# EAGLE board g47_ctl (EAGLE 4.16)
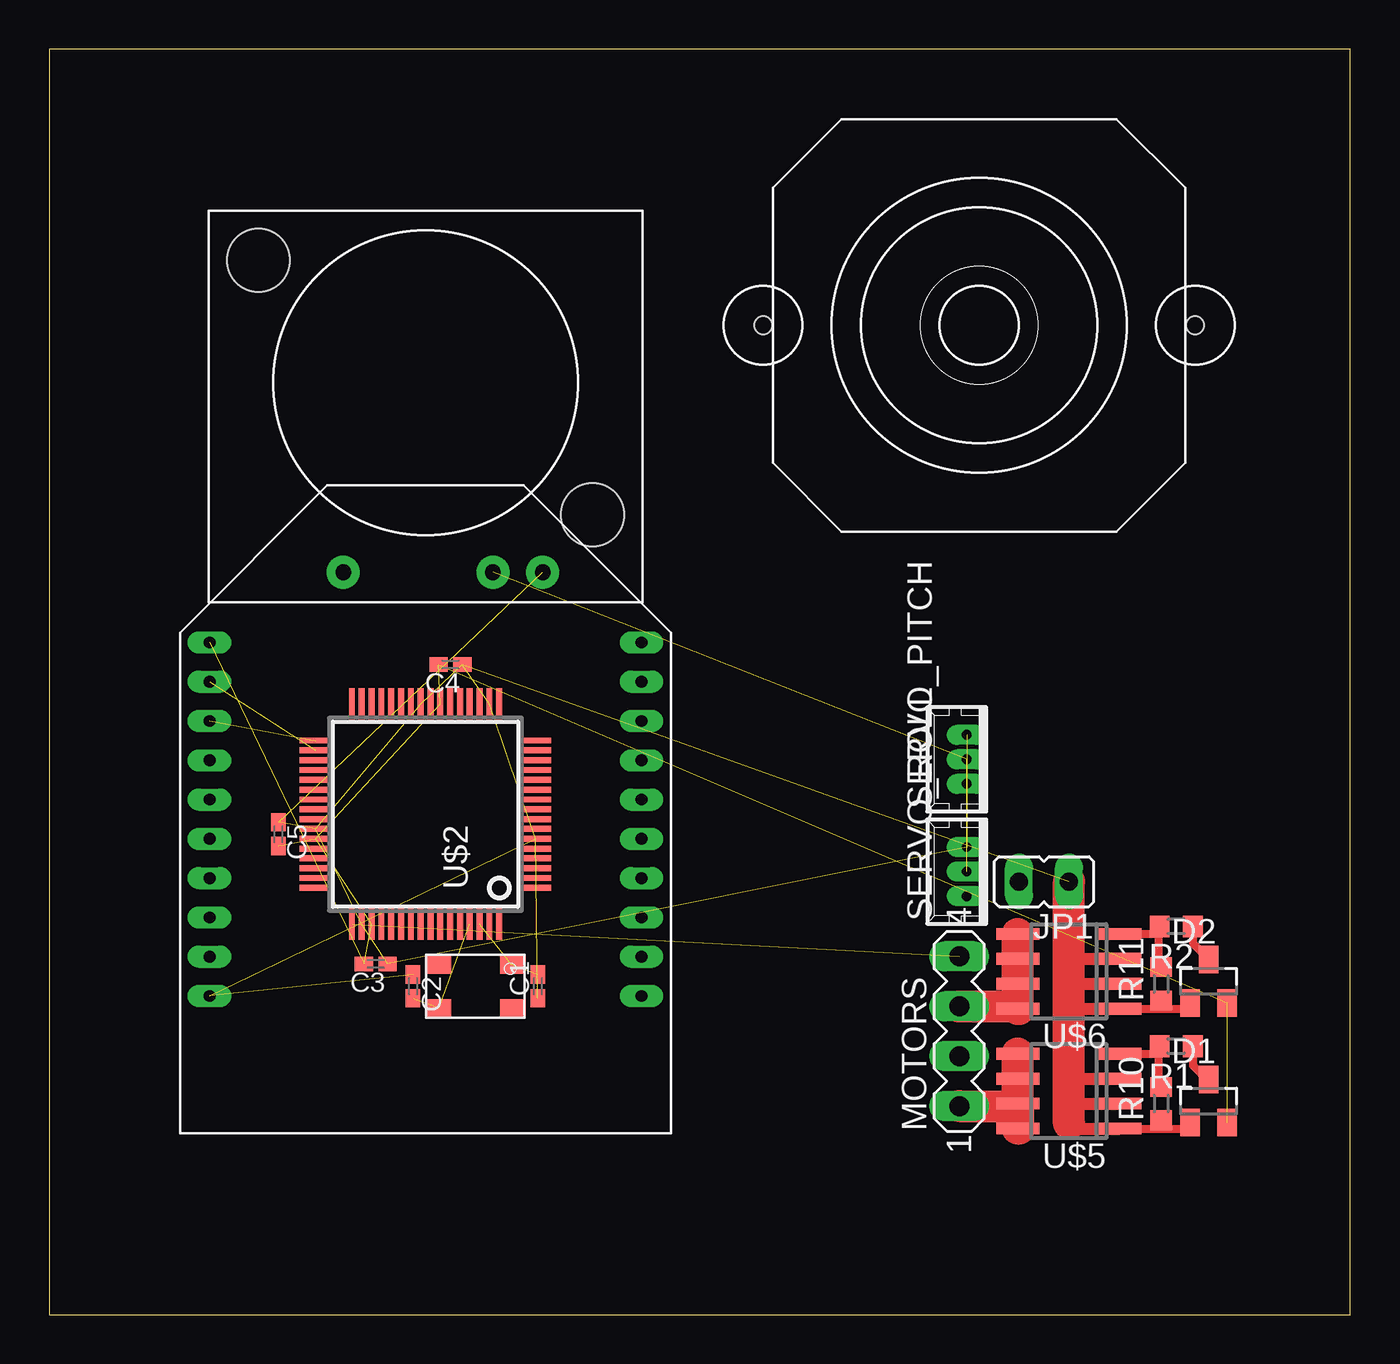
[diagram p0: board, top side]
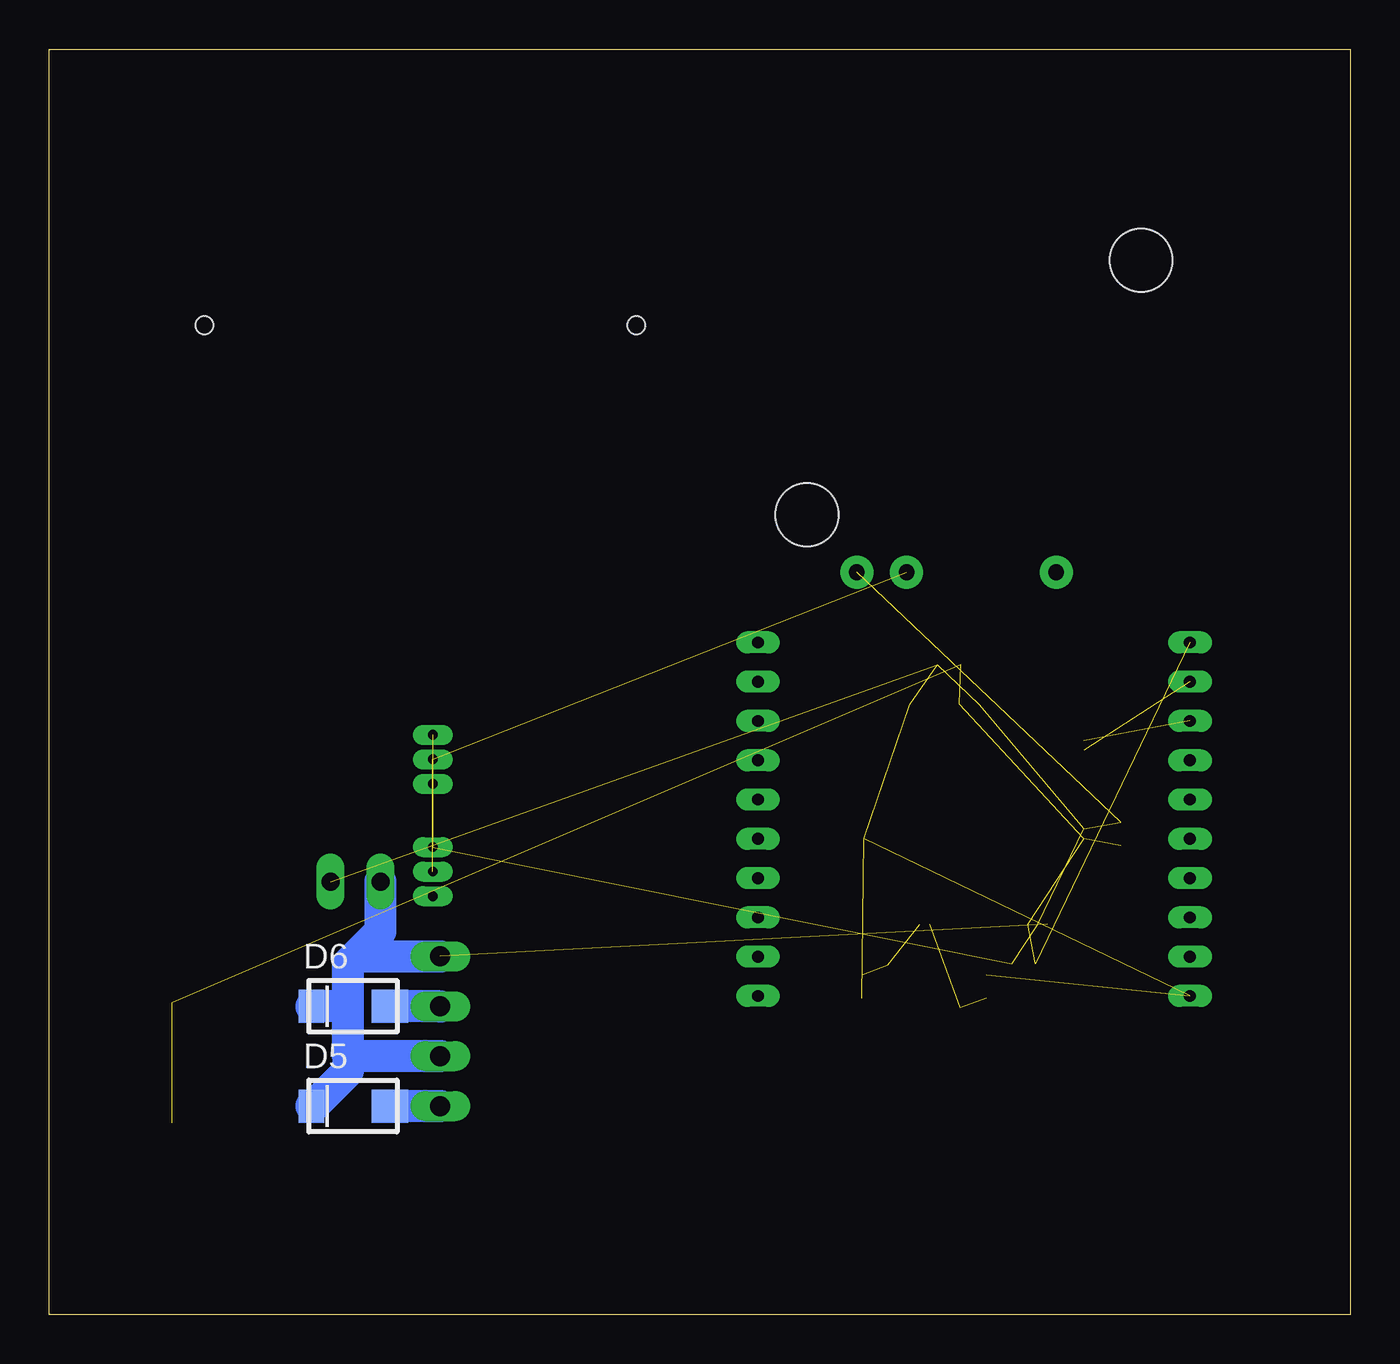
[diagram p1: board, bottom side, seen from below]

Size 66.27 x 64.44 mm. Coordinates in mm from the lower left corner, seen from the top.
Outline: 0,0 66.27,0 66.27,64.44 0,64.44 0,0
Copper layers (1*16): Top 0.035mm / dielectric 1.5mm / Bottom 0.035mm
Design rules "default": minimum track width 10mil, minimum drill 24mil, track to track 8mil, track to pad 8mil, pad to pad 8mil, via to via 8mil, smd to smd 8mil, copper to edge 40mil, drill to drill 8mil, minimum pad ring 10mil, minimum via ring 8mil, stop-mask expansion 4mil, vias tented up to drill 0mil, thermal gap 10mil

## Footprints (pad centres in the part's own frame; a part is rotated, then mirrored left to right if it is on the bottom)
C0402K = smd 0.925 x 0.74: 1 -0.6,0; 2 0.6,0
SOT23 = smd 1 x 1.4: 1 -0.95,-1.1; 2 0.95,-1.1; 3 0,1.1
DO-214BA = smd 1.85 x 1.68: A 1.87,0 | smd 1.32 x 1.68: C -2.12,0
JP1 = drill 0.914 long: 1 0,-1.27; 2 0,1.27
MA04-1 = drill 1.016 long: 1 -3.81,0; 2 -1.27,0; 3 1.27,0; 4 3.81,0
R0603 = smd 1 x 1.1: 1 -0.85,0; 2 0.85,0
53047-03 = drill 0.5 pad 0.698 long: 1 1.25,0; 2 0,0; 3 -1.25,0
XBEE = drill 0.6 long: P$1 -11,9; P$2 -11,7; P$3 -11,5; P$4 -11,3; P$5 -11,1; P$6 -11,-1; P$7 -11,-3; P$8 -11,-5; P$9 -11,-7; P$10 -11,-9; P$11 11,-9; P$12 11,-7; P$13 11,-5; P$14 11,-3; P$15 11,-1; P$16 11,1; P$17 11,3; P$18 11,5; P$19 11,7; P$20 11,9
SQFP-S-10X10-64 = smd 0.3 x 1.6: 1 -3.75,-5.6; 2 -3.25,-5.6; 3 -2.75,-5.6; 4 -2.25,-5.6; 5 -1.75,-5.6; 6 -1.25,-5.6; 7 -0.75,-5.6; 8 -0.25,-5.6; 9 0.25,-5.6; 10 0.75,-5.6; 11 1.25,-5.6; 12 1.75,-5.6; 13 2.25,-5.6; 14 2.75,-5.6; 15 3.25,-5.6; 16 3.75,-5.6; 33 3.75,5.6; 34 3.25,5.6; 35 2.75,5.6; 36 2.25,5.6; 37 1.75,5.6; 38 1.25,5.6; 39 0.75,5.6; 40 0.25,5.6; 41 -0.25,5.6; 42 -0.75,5.6; 43 -1.25,5.6; 44 -1.75,5.6; 45 -2.25,5.6; 46 -2.75,5.6; 47 -3.25,5.6; 48 -3.75,5.6 | smd 1.6 x 0.3: 17 5.6,-3.75; 18 5.6,-3.25; 19 5.6,-2.75; 20 5.6,-2.25; 21 5.6,-1.75; 22 5.6,-1.25; 23 5.6,-0.75; 24 5.6,-0.25; 25 5.6,0.25; 26 5.6,0.75; 27 5.6,1.25; 28 5.6,1.75; 29 5.6,2.25; 30 5.6,2.75; 31 5.6,3.25; 32 5.6,3.75; 49 -5.6,3.75; 50 -5.6,3.25; 51 -5.6,2.75; 52 -5.6,2.25; 53 -5.6,1.75; 54 -5.6,1.25; 55 -5.6,0.75; 56 -5.6,0.25; 57 -5.6,-0.25; 58 -5.6,-0.75; 59 -5.6,-1.25; 60 -5.6,-1.75; 61 -5.6,-2.25; 62 -5.6,-2.75; 63 -5.6,-3.25; 64 -5.6,-3.75
MAXSONAR_ANA.PAC = drill 0.8 pad 1.676 round: P$3 18.415,6.858; P$6 18.415,14.478; P$7 18.415,17.018 | hole 3.2: 2.54,2.54; 15.494,19.558
CTS_CRYSTAL = smd 1.2 x 0.9: P$1 -1.85,-1.1; P$2 1.85,-1.1; P$3 1.85,1.1; P$4 -1.85,1.1
SO08 = smd 0.6 x 2.2: 1 -1.905,-2.6; 2 -0.635,-2.6; 3 0.635,-2.6; 4 1.905,-2.6; 5 1.905,2.6; 6 0.635,2.6; 7 -0.635,2.6; 8 -1.905,2.6
CAM_LENS = hole 0.9: -11,0; 11,0

## Placement (x,y rotation side)
C1  22pF  [C0402K]  24.89,16.73 90 top
C2  22pF  [C0402K]  18.54,16.73 270 top
C3  100nF  [C0402K]  16.63,17.87 180 top
C4  100nF  [C0402K]  20.44,33.11 180 top
C5  100nF  [C0402K]  11.68,24.47 270 top
D1  BAV199  [SOT23]  59.05,10.88 0 top
D2  BAV199  [SOT23]  59.05,16.98 0 top
D5  [DO-214BA]  50.8,10.63 0 bottom
D6  [DO-214BA]  50.8,15.71 0 bottom
JP1  [JP1]  50.67,22.06 90 top
MOTORS  [MA04-1]  46.35,14.44 90 top
R1  100R  [R0603]  57.4,13.68 180 top
R2  100R  [R0603]  57.4,19.77 180 top
R10  10K  [R0603]  56.64,10.76 90 top
R11  10K  [R0603]  56.64,16.85 90 top
SERVO_PITCH  [53047-03]  46.73,28.28 90 top
SERVO_ROLL  [53047-03]  46.73,22.57 90 top
U$1  XBEEPRO  [XBEE]  19.17,25.23 0 top
U$2  LPC2148  [SQFP-S-10X10-64]  19.17,25.49 90 top
U$3  MAXSONAR_ANA  [MAXSONAR_ANA.PAC]  8.12,56.22 270 top
U$4  CRYSTAL_CTS  [CTS_CRYSTAL]  21.71,16.73 0 top
U$5  IRF7809  [SO08]  51.94,11.39 90 top
U$6  IRF7809  [SO08]  51.94,17.49 90 top
U$7  [CAM_LENS]  47.37,50.38 0 top

## Library data of the parts
C1-C5 R1 R2 R10 R11 = rcl
D1 D2 D5 D6 = diode
JP1 = jumper
MOTORS = con-lstb
SERVO_PITCH SERVO_ROLL = con-molex
U$1-U$7 = paparazzi

## Nets
+3V3: C3.2 C4.2 C5.2 D1.2 D2.2 U$1.P$1 U$2.23 U$2.43 U$2.51
+5V: SERVO_PITCH.2 SERVO_ROLL.2 U$3.P$6
GND: C1.1 C2.1 C3.1 C4.1 C5.1 D1.1 D2.1 JP1.1 R10.1 R11.1 SERVO_PITCH.1 SERVO_ROLL.1 U$1.P$10 U$2.6 U$2.18 U$2.25 U$2.42 U$2.50 U$3.P$7 U$5.1 U$5.2 U$5.3 U$6.1 U$6.2 U$6.3
MCU_RXD1: U$1.P$2 U$2.34
MCU_TXD1: U$1.P$3 U$2.33
MCU_XTAL1: C1.2 U$2.62 U$4.P$3
MCU_XTAL2: C2.2 U$2.61 U$4.P$1
N$1: R1.2 R10.2 U$5.4
N$2: U$2.19
N$3: U$3.P$3
N$4: U$2.21
N$5: U$2.31
N$6: U$2.1
N$13: D5.A MOTORS.1 U$5.5 U$5.6 U$5.7 U$5.8
N$14: D6.A MOTORS.3 U$6.5 U$6.6 U$6.7 U$6.8
N$19: R2.2 R11.2 U$6.4
PWM0: D1.3 R1.1
PWM1: D2.3 R2.1
SERV_PITCH: SERVO_PITCH.3
SERV_ROLL: SERVO_ROLL.3
VBAT: D5.C D6.C JP1.2 MOTORS.2 MOTORS.4 U$2.49
VDDA3: U$2.7
VSSA: U$2.59

## Tracks (layer width: path | path; a pad name or v marks a point on that pad's centre or on a via)
+3V3  (8 unrouted)
+5V  (2 unrouted)
GND  (14 unrouted)
  Top 0.406: 58.03,15.88 58.03,15.96 | 58.03,15.88 D2.1 | U$6.1 56.64,15.58 | 56.64,15.58 58.03,15.58 58.03,15.88 | 56.64,15.58 R11.1 | D1.1 58.03,9.78 58.03,9.49 56.64,9.49 | U$5.1 56.64,9.49 | 56.64,9.49 R10.1
  Top 0.61: 51.94,9.74 51.94,9.49 U$5.1 | 51.94,10.76 U$5.2 | 51.94,12.03 U$5.3 | 51.94,15.58 U$6.1 | 51.81,16.85 51.94,16.85 U$6.2 | 51.81,18.12 51.94,18.12 U$6.3
  Top 1.626: 51.94,9.74 51.94,10.76 51.94,12.03 51.94,15.58 51.94,16.85 51.94,18.12 JP1.1
MCU_RXD1  (1 unrouted)
MCU_TXD1  (1 unrouted)
MCU_XTAL1  (2 unrouted)
MCU_XTAL2  (2 unrouted)
N$1
  Top 0.406: U$5.4 56.51,13.3 56.51,13.68 | 56.51,13.68 R1.2 | R10.2 56.51,11.61 56.51,13.68
N$13
  Top 1.626: U$5.6 U$5.5 | U$5.6 49.4,12.03 | U$5.7 U$5.6 | U$5.7 49.4,10.76 | U$5.7 U$5.8 49.4,9.49 | U$5.7 49.34,10.7 49.27,10.63 MOTORS.1
  Bottom 1.626: MOTORS.1 D5.A
N$14
  Top 1.626: U$6.6 U$6.5 | U$6.6 49.4,18.12 | U$6.7 U$6.6 | U$6.7 49.4,16.85 | U$6.8 U$6.7 | U$6.8 49.4,15.58 | U$6.8 49.34,15.71 MOTORS.3
  Bottom 1.626: MOTORS.3 D6.A
N$19
  Top 0.406: U$6.4 56.51,19.39 56.51,19.77 | 56.51,19.77 R2.2 | R11.2 56.51,17.7 56.51,19.77
PWM0
  Top 0.406: D1.3 59.05,11.9 58.25,12.7 R1.1
PWM1
  Top 0.406: D2.3 59.05,18.12 58.25,18.92 R2.1
VBAT  (1 unrouted)
  Bottom 1.626: JP1.2 49.4,19.52 50.67,18.25 | 50.67,18.25 51.05,17.87 51.05,15.71 | 51.05,13.17 51.05,15.71 | MOTORS.2 51.05,13.17 | D5.C 52.83,10.63 51.05,12.41 51.05,13.17 | 51.05,15.71 D6.C | 50.67,18.25 MOTORS.4